# Altium PCB PCB1.PcbDoc
Units mm, origin at the board's own origin, x right, y up, seen from the top; angles counter-clockwise.
Board outline 82.6 x 21 mm, 2 copper layers (Top Layer, Bottom Layer), stack 1.571 mm thick; 58 components, 49 nets, 248 pads, 61 vias.
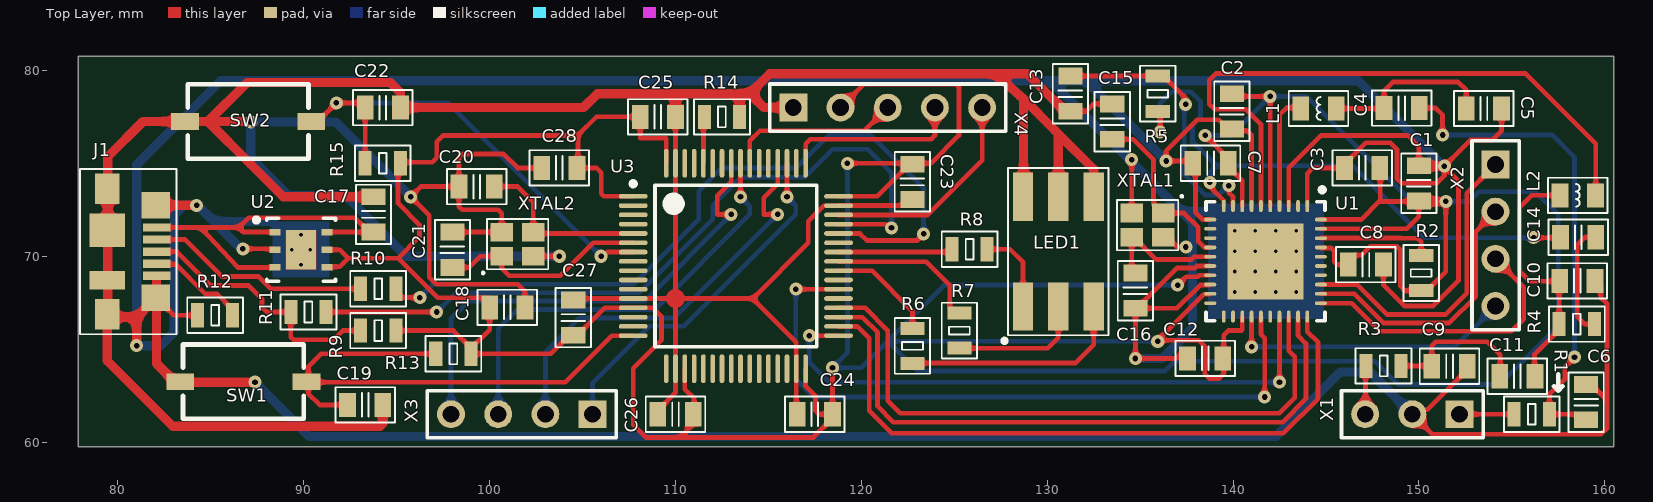
[diagram p0: Top Layer view]
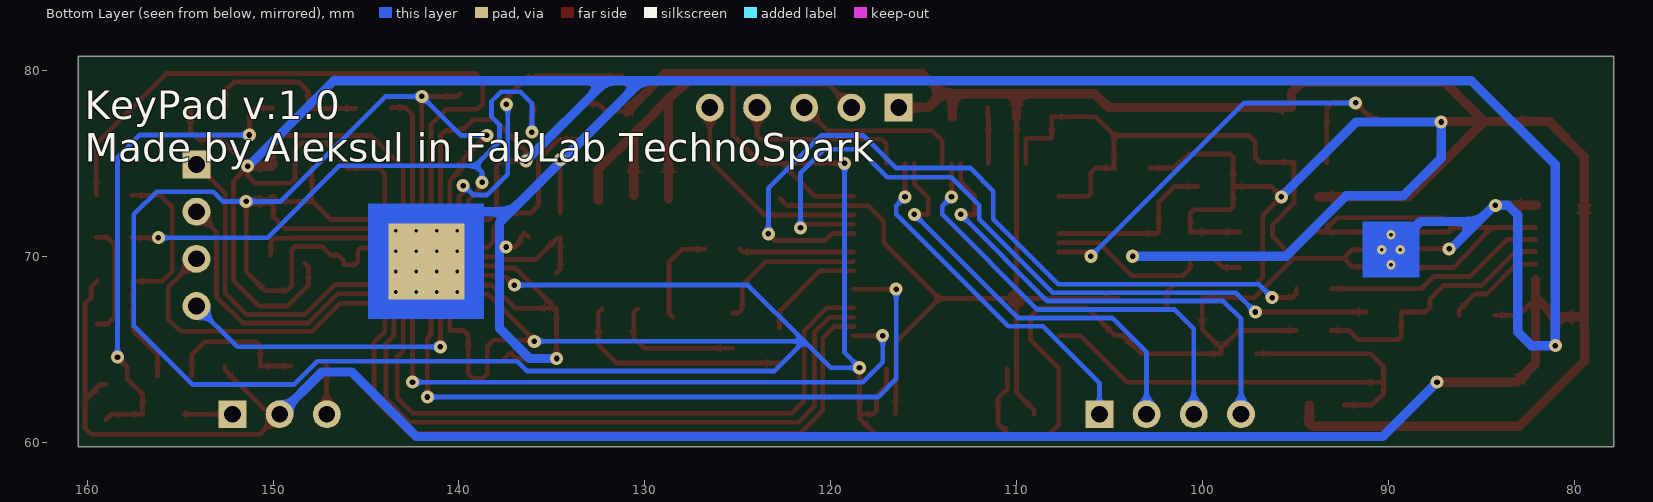
[diagram p1: Bottom Layer view, seen from below]

## Layer stack, top to bottom
Top Solder: solder mask 0.0102, Solder Resist, Dk 3.5
Top Layer: signal copper 0.0356
Dielectric 1: dielectric 1.5, FR-4, Dk 4.8
Bottom Layer: signal copper 0.0356
Bottom Solder: solder mask 0.0102, Solder Resist, Dk 3.5

## Board outline
160.475,80.75 77.875,80.75 77.875,59.75 160.475,59.75

## Design rules (kind name [scope] priority, off if disabled: settings)
Clearance [All] p1: gap=0.2 ignorepadtopadclearanceinfootprint=FALSE
PolygonConnect [All] p1: connectstyle=Relief reliefconductorwidth=0.254 reliefentries=4 polygonreliefangle="90 Angle" airgapwidth=0.254
RoutingVias [All] p1: holewidth=0.3 width=0.7 viastyle="Through Hole" minholewidth=0.3 minwidth=0.7 maxholewidth=0.711 maxwidth=1.27
SolderMaskExpansion [All] p1: expansion=0.102
Width [All] p1: maxlimit=1 minlimit=0.254 preferedwidth=0.254
30 further rules are at their usual default settings.

## Classes and differential pairs
component class pn532: C1 C2 C3 C4 C5 C6 C7 C8 C9 C10 C11 C12 C13 C14 C15 C16 L1 L2 R1 R2 R3 R4 R5 U1 X1 X2 XTAL1
component class some_mini_things: C17 C18 C19 J1 LED1 R6 R7 R8 R9 R10 R11 R12 R13 SW1 U2
component class STM32: C20 C21 C22 C23 C24 C25 C26 C27 C28 R14 R15 U3 X3 X4 XTAL2

## Components (designator, comment, footprint, x,y, rotation, side; value= is the part's Value field where it differs from the comment)
C1 "10uF 16V" C_0805 150,73.925 r270 top
C2 "100nf 16V" C_0805 139.94,77.8 r270 top
C3 "100nF 16V" C_0805 146.95,74.75 r180 top
C4 "68pF 16V" C_0805 149.075,77.975 r0 top
C5 "220pF 16V" C_0805 153.5,77.95 r180 top
C6 "100pF 16V" C_0805 159,62.15 r270 top
C7 "100nF" C_0805 138.79,75.002 r180 top
C8 "100nF" C_0805 147.15,69.55 r0 top
C9 "100pF 16V" C_0805 151.65,64.08 r0 top
C10 "220pF 16V" C_0805 158.525,68.675 r0 top
C11 "68pF 16V" C_0805 155.3,63.541 r180 top
C12 "100nF 16V" C_0805 138.5,64.5 r0 top
C13 "100nF 16V" C_0805 131.25,78.75 r90 top
C14 "1nF 16V" C_0805 158.575,71.025 r0 top
C15 "12pF 16V" C_0805 133.5,77.239 r270 top
C16 "12pF 16V" C_0805 134.75,68.15 r90 top
C17 "4.7uF 16V" C_0805 93.75,72.25 r270 top
C18 "4.7uF 16V" C_0805 100.95,67.25 r180 top
C19 "100nF 16V" C_0805 93.3,62 r0 top
C20 "10pF 16V" C_0805 99.3,73.75 r0 top
C21 "10pF 16V" C_0805 98,70.35 r270 top
C22 "100nF 16V" C_0805 94.25,78 r180 top
C23 "100nF 16V" C_0805 122.75,74 r270 top
C24 "100nF 16V" C_0805 117.5,61.5 r180 top
C25 "100nF 16V" C_0805 109.048,77.5 r0 top
C26 "100nF 16V" C_0805 110,61.5 r180 top
C27 "100nF 16V" C_0805 104.5,66.7 r90 top
C28 "100nF 16V" C_0805 103.75,74.75 r180 top
J1 "473460001" MICRO-USB 82.075,69.6 r270 top
L1 "560nH" L_0805 144.6,77.95 r180 top
L2 "560nH" L_0805 158.55,73.275 r0 top
LED1 "TO-5050BC" TO-5050BC 129.2,67.95 r270 top
R1 "1.5R" R_0805 156.075,61.5 r180 top
R2 "10k" R_0805 150.125,69.1 r90 top
R3 "1.5R" R_0805 148.1,64.1 r180 top
R4 "1.6k" R_0805 158.5,66.35 r180 top
R5 "1k" R_0805 135.95,78.75 r90 top
R6 "220R" R_0805 122.75,65.175 r270 top
R7 "220R" R_0805 125.275,66 r270 top
R8 "220R" R_0805 125.825,70.375 r0 top
R9 "1K5" R_0805 94,66 r0 top
R10 "22R" R_0805 94,68.25 r0 top
R11 "22R" R_0805 90.25,67 r0 top
R12 "100K" R_0805 85.225,66.825 r180 top
R13 "100k" R_0805 98.05,64.75 r180 top
R14 "100k" R_0805 112.5,77.5 r180 top
R15 "100k" R_0805 94.25,75.002 r180 top
SW1 "KLS7-TS3608" KLS7-TS3611 86.75,63.25 r0 top
SW2 "KLS7-TS3608" KLS7-TS3611 87,77.25 r180 top
U1 "PN532/C1" NXP-HVQFN-40_L 141.75,69.725 r270 top
U2 "LP38692-3.3V" WSON-6 89.85,70.35 r0 top
U3 "STM32F103RET6" LQFP64_L 113.25,69.475 r0 top
X1 "PLS-3" PLS-3-3D 152.19,61.5 r180 top
X2 "PLS-4" PLS-4-3D 154.125,74.94 r270 top
X3 "PLS-4" PLS-4-3D 105.54,61.5 r180 top
X4 "PLS-5" PLS-5-3D 116.34,78 r0 top
XTAL1 "27.12 MHz" NX2520SA 135.65,70.825 r180 top
XTAL2 "NX2520SA 16MHz" NX2520SA 101.25,71.5 r0 top

## Footprints (in the part's own frame and the unit in brackets; to place one, negate y for a bottom-side part, rotate by r counter-clockwise, add the part's x,y. Pads: shape width x height; smd on the part's side, far side on the other; paste and mask are expansions set on the pad)
C_0805 [mm] "Capacitor Pattern"
  rect 0.9x1.3 smd: 1(-0.95,0) 2(0.95,0)
  silkscreen extent -1.6,-0.95 1.6,0.95, body extent -1,-0.63 1,0.62, height 0.6
KLS7-TS3611 [mm]
  rect 1.5x0.9 smd mask+0: 1(-3.4,0) 2(3.4,0)
  silkscreen extent -3.25,-2 3.25,2, body extent -3.15,-1.75 3.15,1.75, height 5
L_0805 [mm] "Inductor Pattern"
  rect 0.9x1.3 smd: 1(-0.95,0) 2(0.95,0)
  silkscreen extent -1.6,-0.95 1.6,0.95, body extent -1,-0.6 1,0.6, height 0.96
LQFP64_L [mm] "Thin QFP, 64-Leads, Body 10x10mm, Pitch 0.5mm, IPC High Density"
  oval 1.55x0.25 smd: 1(-5.525,3.75) 2(-5.525,3.25) 3(-5.525,2.75) 4(-5.525,2.25) 5(-5.525,1.75) 6(-5.525,1.25) 7(-5.525,0.75) 8(-5.525,0.25) 9(-5.525,-0.25) 10(-5.525,-0.75) 11(-5.525,-1.25) 12(-5.525,-1.75) 13(-5.525,-2.25) 14(-5.525,-2.75) 15(-5.525,-3.25) 16(-5.525,-3.75) 33(5.525,-3.75) 34(5.525,-3.25) 35(5.525,-2.75) 36(5.525,-2.25) 37(5.525,-1.75) 38(5.525,-1.25) 39(5.525,-0.75) 40(5.525,-0.25) 41(5.525,0.25) 42(5.525,0.75) 43(5.525,1.25) 44(5.525,1.75) 45(5.525,2.25) 46(5.525,2.75) 47(5.525,3.25) 48(5.525,3.75)
  oval 0.25x1.55 smd: 17(-3.75,-5.525) 18(-3.25,-5.525) 19(-2.75,-5.525) 20(-2.25,-5.525) 21(-1.75,-5.525) 22(-1.25,-5.525) 23(-0.75,-5.525) 24(-0.25,-5.525) 25(0.25,-5.525) 26(0.75,-5.525) 27(1.25,-5.525) 28(1.75,-5.525) 29(2.25,-5.525) 30(2.75,-5.525) 31(3.25,-5.525) 32(3.75,-5.525) 49(3.75,5.525) 50(3.25,5.525) 51(2.75,5.525) 52(2.25,5.525) 53(1.75,5.525) 54(1.25,5.525) 55(0.75,5.525) 56(0.25,5.525) 57(-0.25,5.525) 58(-0.75,5.525) 59(-1.25,5.525) 60(-1.75,5.525) 61(-2.25,5.525) 62(-2.75,5.525) 63(-3.25,5.525) 64(-3.75,5.525)
  silkscreen extent -5.65,-4.35 4.35,4.55, body extent -4.35,-4.35 4.35,4.35, height 1.6
MICRO-USB [mm] "molex 473460001"
  rect 0.45x1.48 smd mask+0.1: 1(-1.95,0) 2(-1.3,0) 3(-0.65,0) 4(0,0)
  rect 0.45x1.48 smd paste+0 mask+0.1: 5(0.65,0)
  rect 1.65x1.3 smd mask+0.1: 6(-4.025,-2.65) 6(2.725,-2.65)
  rect 1.425x1.55 smd mask+0.1: 6(-3.14,-0.04) 6(1.84,-0.04)
  rect 1.8x1.9 smd mask+0.1: 6(-1.8,-2.65)
  rect 1x1.9 smd mask+0.1: 6(0.9,-2.65)
  silkscreen extent -5.1,-4.13 3.8,1.07, body extent -4.64,-4.45 3.34,0.98, height 2.63
NX2520SA [mm] "quartz resonator"
  rect 1.2x1 smd: 1(-0.6,-1.5) 2(1.1,-1.5) 3(1.1,-0.2) 4(-0.6,-0.2)
  silkscreen extent -1.65,-2.45 1.9,0.5, body extent -1.4,-2.2 1.9,0.5, height 0.5
NXP-HVQFN-40_L [mm] "QFN, 40-Leads, Body 6.1x6.1mm, Pitch 0.5mm, Thermal Pad 4.1x4.1mm, IPC High Density"
  oval 0.65x0.2 smd: 1(-2.975,2.25) 2(-2.975,1.75) 3(-2.975,1.25) 4(-2.975,0.75) 5(-2.975,0.25) 6(-2.975,-0.25) 7(-2.975,-0.75) 8(-2.975,-1.25) 9(-2.975,-1.75) 10(-2.975,-2.25) 21(2.975,-2.25) 22(2.975,-1.75) 23(2.975,-1.25) 24(2.975,-0.75) 25(2.975,-0.25) 26(2.975,0.25) 27(2.975,0.75) 28(2.975,1.25) 29(2.975,1.75) 30(2.975,2.25)
  oval 0.2x0.65 smd: 11(-2.25,-2.975) 12(-1.75,-2.975) 13(-1.25,-2.975) 14(-0.75,-2.975) 15(-0.25,-2.975) 16(0.25,-2.975) 17(0.75,-2.975) 18(1.25,-2.975) 19(1.75,-2.975) 20(2.25,-2.975) 31(2.25,2.975) 32(1.75,2.975) 33(1.25,2.975) 34(0.75,2.975) 35(0.25,2.975) 36(-0.25,2.975) 37(-0.75,2.975) 38(-1.25,2.975) 39(-1.75,2.975) 40(-2.25,2.975)
  rect 4.1x4.1 smd: 41(0,0)
  rect 4.1x4.1 smd far side: 41(0,0)
  silkscreen extent -3.97,-3.2 3.2,3.2, body extent -3.05,-3.05 3.05,3.05, height 1
PLS-3-3D [mm] "Connector; Header; 3 Position"
  rect 1.5x1.5 hole 0.9: 1(0,0)
  round 1.5 hole 0.9: 2(2.54,0) 3(5.08,0)
  silkscreen extent -1.27,-1.27 6.35,1.27, body extent -1.27,-1.27 6.35,1.27, height 8.44
PLS-4-3D [mm] "Connector; Header; 4 Position"
  rect 1.5x1.5 hole 0.9: 1(0,0)
  round 1.5 hole 0.9: 2(2.54,0) 3(5.08,0) 4(7.62,0)
  silkscreen extent -1.27,-1.27 8.89,1.27, body extent -1.27,-1.27 8.89,1.27, height 8.44
PLS-5-3D [mm] "Connector; Header; 5 Position"
  rect 1.5x1.5 hole 0.9: 1(0,0)
  round 1.5 hole 0.9: 2(2.54,0) 3(5.08,0) 4(7.62,0) 5(10.16,0)
  silkscreen extent -1.27,-1.27 11.43,1.27, body extent -1.27,-1.27 11.43,1.27, height 8.44
R_0805 [mm] "Resistor Pattern"
  rect 0.7x1.3 smd: 1(-0.95,0) 2(0.95,0)
  silkscreen extent -1.5,-0.95 1.5,0.95, body extent -1,-0.6 1,0.6, height 0.5
TO-5050BC [mm] "RGB led"
  rect 2.6x1.1 smd: 1(-5.25,-0.5) 2(-5.25,1.4) 3(-5.25,3.3) 4(0.65,3.3) 5(0.65,1.4) 6(0.65,-0.5)
  silkscreen extent -6.8,-1.6 2.6,4.1, body extent -6.8,-1.3 2.2,4.1, height 1.9
WSON-6 [mm] "TI wson"
  rect 0.6x0.35 smd paste-0.175 mask+0.051: 1(-1.4,0.95) 2(-1.4,0) 3(-1.4,-0.95) 4(1.4,-0.95) 5(1.4,0) 6(1.4,0.95)
  rect 1.6x2.1 smd paste-0.8 mask+0.051: 7(0,0)
  silkscreen extent -2.52,-1.7 1.85,1.72, body extent -1.51,-1.49 1.51,1.51, height 0.75

## Part data
C1 C2 C3 C4 C5 C6 C7 C8 C9 C10 C11 C12 C13 C14 C15 C16 C17 C18 C19 C20 C21 C22 C23 C24 C25 C26 C27 C28: library part C0805, "Capacitor"
J1: library part MICRO-USB, "molex 473460001"
L1 L2: library part L0805, "MLF2012DR56K"
LED1: "RGB led"
R1 R2 R3 R4 R5 R6 R7 R8 R9 R10 R11 R12 R13 R14 R15: library part R0805, "Resistor"
SW1 SW2: library part button
U2: library part LP38692, "LP38690, LP38692 1-A LDO CMOS Linear Regulators  Stable with Ceramic Output Capacitors"
U3: "STM32 ARM-based 32-bit MCU Performance Line with 512 kB Flash, 64 kB Internal RAM, -40 to +85°C Temperature, 64-Pin LQFP, Tray", ComponentLink1Description="Manufacturer URL", ComponentLink1URL=http://www.st.com/, ComponentLink2Description="STM32F103 Datasheet", ComponentLink2URL=http://www.st.com/internet/com/TECHNICAL_RESOURCES/TECHNICAL_LITERATURE/DATASHEET/CD00191185.pdf, ComponentLink3Description="STM32 Family Web Page", ComponentLink3URL=www.st.com/stm32, DatasheetVersion="rev8.0, Apr-2011", PackageDescription="64-Pin Low-Profile Quad Flat Pack, 10 x 10 mm Body, 0.5 mm Pitch (LQFP64)", PackageReference=LQFP64, PackageVersion="rev13, Apr-2011"
X1: "Header, 3-Pin", LatestRevisionDate=17-Jul-2002, LatestRevisionNote="Re-released for DXP Platform.", Publisher="Altium Limited"
X2 X3: "Header, 4-Pin", LatestRevisionDate=17-Jul-2002, LatestRevisionNote="Re-released for DXP Platform.", Publisher="Altium Limited"
X4: "Header, 5-Pin", LatestRevisionDate=17-Jul-2002, LatestRevisionNote="Re-released for DXP Platform.", Publisher="Altium Limited"
XTAL1 XTAL2: library part NX2520SA, "Quartz"

## Via types
v1: diameter 0.7, hole 0.3, Top Layer to Bottom Layer, tented both sides, 41 vias
v2: diameter 0.5, hole 0.2, Top Layer to Bottom Layer, 20 vias

## Nets (pads, with @x,y where several pads share a name; then routed paths per layer and width w, separated by ;. In a path a pad name is that pad's centre, name@x,y a point inside that pad or via, vN(x,y) a via of type N, cw(c..) or ccw(c..) an arc to the next point about the centre after c; other vN are vias at no path point)
+3.3: C1.2 C2.1 C3.1 C7.1 C8.1 C12.2 C18.2 C23.1 C24.1 C25.1 C26.1 C27.1 C28.1 R2.1 R9.2 R13.1 R15.1 U1.5 U1.8 U1.17 U1.19 U1.23 U1.37 U1.39 U1.40 U2.4 U2.5 U3.1 U3.13 U3.19 U3.32 U3.48 U3.64 X4.2 | length 281.9
  Top Layer w0.254: U2.4 91.281,69.431 91.931,69.431 92.388,69.888 ; U2.5 91.256,70.344 91.931,70.344 92.388,69.888 ; R9.2 98.05,66 R13.1@99,65.05 ; R15.1@95.073,75.062 95.202,75.058 96.907,75.058 97.149,75.3 97.149,76.149 97.5,76.5 104.75,76.5 ; 95.084,69.899 97.209,67.773 100,67.773 C18.2 100,66.05 R13.1@99,65.05 ; R15.1 95.073,74.875 95.073,72.852 96.225,71.7 96.225,71.051 95.073,69.899 92.399,69.899 92.388,69.888 ; U3.1 106.149,73.225 106,73.374 106,74.5 105.75,74.75 C28.1 104.75,74.8 104.75,76.5 ; U3.64 109.5,76.351 108.1,76.351 108.1,77.5 C25.1 105.75,77.5 104.75,76.5 ; U3.19 110.5,62.851 111,62.351 111,61 110.25,60.25 ; U3.32 117,63 117.535,62.465 117.535,61.679 117.714,61.5 C24.1 ; v1(118.45,64) C24.1 ; U3.48 120.85,73.225 122.625,75 v1(119.25,75) ; X4.2 120.13,79.25 125.101,79.25 125.25,79.101 125.25,76.5 123.752,75.002 C23.1@122.725,75.002 ; v1(137.025,68.45) 137.477,68.902 138.111,68.902 138.184,68.975 U1.17 ; v1(138.5,76.5) 139.74,75.26 C7.1 139.74,74.836 140.5,74.075 U1.8 ; U1.19@138.748,67.948 138.419,67.948 135.95,65.479 v1(135.95,65.425) 136.002,65.477 138.148,65.477 138.475,65.15 138.475,63.673 138.723,63.425 139.25,63.425 139.5,63.675 139.5,65.75 139.75,66 140.456,66 140.5,66.044 U1.23 ; C2.1 140.09,78.6 v1(142,78.6) U1.5 ; C7.1@139.994,74.788 C7.1@139.994,74.994 ; U1.37@144.725,70.448 145.277,70.448 145.45,70.275 145.45,69.7 145.6,69.55 146.096,69.55 C8.1@146.2,69.654 ; U1.39 149.36,71.475 150,72.115 C1.2@150,73.05 ; U1.40 146.9,71.975 147.875,72.95 149.85,72.95 C1.2@150,73.1 ; C8.1 C8.1@146.2,69.654 ; 147.925,72.95 C3.1@147.925,74.75 ; v1(151.45,72.95) 151.45,69.175 150.425,68.15 R2.1 149.25,68.15 149,68.4 149,70.35 148.823,70.527 147.387,70.527 146.933,70.073 146.523,70.073 146.2,69.75 C8.1@146.2,69.654 ; R13.1@99,65.05 R13.1 103.3,64.75 104.3,65.75 C27.1 104.725,65.75 106.2,67.225 U3.13 108.775,67.225 109.25,66.75 109.25,65.5 107.725,63.975 107.725,60.925 108.4,60.25 110.25,60.25 ; 110.25,60.25 117.425,60.25 118.45,61.275 C24.1
  Top Layer w0.5: C1.2@150,73.1 150.05,73.1 150.2,72.95 v1(151.45,72.95)
  Bottom Layer w0.254: v1(119.25,75) 119.25,64.8 v1(118.45,64) 120,64 121.425,65.425 ; v1(135.95,65.425) 121.425,65.425 ; v1(137.025,68.45) 124.45,68.45 121.425,65.425 ; v1(138.5,76.5) 139.9,76.5 v1(142,78.6) 143.95,78.6 149.6,72.95 v1(151.45,72.95) 152.707,72.95 153.234,73.477 156.273,73.477 157.5,72.25 157.5,66.25 154.35,63.1 148.866,63.1 147.614,64.352 136.868,64.352 136.339,63.823 123.027,63.823 121.425,65.425
+5: C17.2 J1.1 U2.1 U2.3 U2.6 | length 21.7
  Top Layer w0.254: J1.1 84.425,71.55 ; 86.35,71.55 86.5,71.55 ; U2.3@88.438,69.388 U2.3 86.45,69.4 84.425,71.55 ; U2.1 86.75,71.3 86.5,71.55 ; U2.6 C17.2@93.525,71.3 ; C17.2 C17.2@93.525,71.3 ; 84.425,71.55 86.5,71.55 ; 86.5,71.55 87.025,72.075 92.75,72.075 C17.2@93.525,71.3
GND: C1.1 C2.2 C3.2 C5.1 C6.1 C7.2 C8.2 C9.2 C10.2 C12.1 C13.1 C15.1 C16.1 C17.1 C18.1 C19.2 C20.1 C21.1 C22.1 C23.2 C24.2 C25.2 C26.2 C27.2 C28.2 J1.5 J1.6 LED1.1 LED1.2 LED1.3 R12.2 R14.1 SW1.1 SW2.2 U1.1 U1.3 U1.7 U1.11 U1.16 U1.18 U1.41 U2.2 U2.7 U3.12 U3.18 U3.31 U3.47 U3.63 X1.2 X4.1 XTAL1.2 XTAL1.4 XTAL2.2 XTAL2.4 | length 553.3
  Top Layer w0.254: J1.6@82.075,67.1 82.4,67.425 83,66.825 R12.2 ; v1(86.725,70.4) 88.4,70.4 U2.2 ; v2(89.35,70.35) U2.7 ; C21.1 XTAL2.4 100.65,72.31 100.46,72.5 98.525,72.5 98.35,72.675 C20.1 ; C18.1 101.9,68.125 101.525,68.5 97.124,68.5 96.75,68.874 96.75,72.2 v1(95.75,73.2) 96.3,73.75 C20.1 ; XTAL2.2 v1(103.75,70) ; C28.2 101.5,74.75 100.75,75.5 98.499,75.5 98.35,75.351 C20.1 ; C27.2@104.5,67.725 U3.12 109.75,67.725 110,67.725 ; C26.2 109.05,61.7 110,62.65 U3.18 110,65.5 110,67.475 110,67.725 ; C25.2@110,77.5 U3.63 110,67.975 110,67.725 ; C24.2 116.5,61.55 U3.31 116.498,63.952 116.498,65.377 114.15,67.725 ; C23.2@122.725,73.102 122.35,72.727 118.777,72.727 U3.47 118.773,72.723 117.984,72.723 117.15,71.889 117.15,70.725 114.15,67.725 ; C13.1 132.1,77.8 132.5,78.2 C15.1@133.5,78.2 ; XTAL1.2 v1(134.55,75.2) ; C16.1 C16.1@134.95,67.2 ; XTAL1.4 136.475,71.25 136.663,71.062 136.663,70.835 137,70.498 v1(137.466,70.498) ; C12.1 137.25,64.8 136.95,64.5 v1(134.75,64.5) 134.75,67 C16.1@134.95,67.2 ; U1.18@138.748,68.448 138.23,68.448 136.982,67.2 C16.1@134.95,67.2 ; U1.16 138.042,69.475 137.934,69.367 136.985,69.367 134.95,67.332 C16.1@134.95,67.2 ; U1.11 138.374,71.975 137.977,72.372 137.977,74.864 C7.2 137.717,75.125 v1(136.4,75.125) 136.4,75.675 138.077,77.352 139.238,77.352 139.74,76.85 C2.2 140.04,76.75 140.75,76.75 141,76.5 U1.7 ; U1.41@139.827,69.718 U1.41@139.834,69.725 ; U1.41@141.466,69.725 U1.41@141.608,69.583 ; U1.3 143,74.75 144.75,76.5 149.4,76.5 150,75.9 C1.1@150,74.95 ; U1.1 144,74.45 144.3,74.75 C3.2 146,74.95 147.15,76.1 148.473,76.1 148.823,75.75 148.823,74.177 149.075,73.925 150.975,73.925 151.375,74.325 v1@151.375,74.82 ; C8.2@148.325,69.65 148.096,69.421 148.096,68.454 149.23,67.32 150.757,67.32 152.127,68.69 152.127,74.068 v1@151.375,74.82 ; C9.2 152.6,63.88 150.458,61.738 149.888,61.738 X1.2 150.727,60.423 159.799,60.423 160.127,60.751 160.127,62.25 ; C5.1 154.45,76.75 153.95,76.25 152.775,76.25 v1(151.375,74.85) v1@151.375,74.82 ; C6.1 159.277,63.1 160.127,62.25 ; C10.2 159.798,68.352 159.798,67.767 160.127,67.438 160.127,62.25 ; 110,67.725 110.25,67.725 114.15,67.725
  Top Layer w0.5: 79.425,66 79.425,64.375 82.95,60.85 94.101,60.85 94.25,60.999 C19.2 ; J1.6@79.45,66.2 79.45,66.735 81.01,66.735 ; J1.6@79.45,66.975 79.45,68.7 79.45,71.4 79.45,73.625 79.45,75.35 81.35,77.25 SW2.2 84.85,77.25 ; v1(81.01,65.19) 81.01,66.735 ; J1.6@82.035,67.76 81.01,66.735 ; J1.6@82.035,72.74 v1(84.235,72.74) ; J1.5@82.075,68.75 82.075,67.76 82.075,67.1 82.075,64.225 83.05,63.25 SW1.1 ; SW1.1@83.35,63.225 v1(87.375,63.225) ; v1(87.15,77.225) 87.125,77.25 84.85,77.25 ; C17.1 88.9,73.2 ; C25.2@110,77.5 110,78.75 ; R14.1 113.45,78.75 ; X4.1 114.75,78 114,78.75 ; LED1.1@128.725,73.075 128.725,78.475 ; LED1.2@130.6,73.275 130.6,75.925 130.6,76.575 ; C13.1@130.975,77.775 128.923,79.827 127.173,79.827 ; LED1.3@132.5,73 132.5,74.675 130.6,76.575 130.401,76.776 128.725,78.475 ; C1.1@150,74.95 150.1,74.85 v1(151.375,74.85) ; 84.85,77.25 87.15,74.95 ; 84.85,77.25 86.951,79.351 94.649,79.351 95.2,78.8 C22.1 105.05,78 105.8,78.75 110,78.75 ; 87.15,74.95 88.9,73.2 ; 87.15,74.95 88.9,73.2 ; 110,78.75 113.45,78.75 ; 113.45,78.75 114,78.75 ; 114,78.75 115.077,79.827 127.173,79.827 ; 127.173,79.827 128.531,78.644 128.725,78.475 ; 109.75,67.725 cw(c110,67.725) 110,67.975 cw(c110,67.725) 110.25,67.725 cw(c110,67.725) 110,67.475 cw(c110,67.725) 109.75,67.725
  Bottom Layer w0.5: v1(86.725,70.4) 86.625,70.4 85.16,71.865 ; v1(87.375,63.225) 90.3,60.3 142.25,60.3 ; 88.75,71.375 88.26,71.865 85.16,71.865 ; v1(95.75,73.2) 91.725,77.225 v1(87.15,77.225) 87.15,75.288 89.188,73.25 92.25,73.25 95.5,70 v1(103.75,70) ; v1(134.75,64.5) 136.2,64.5 137.825,66.125 137.825,71.8 137.225,72.4 ; v1(136.4,75.125) 132.075,79.45 ; 141.75,71.815 141.165,72.4 137.225,72.4 ; 142.3,60.3 145.775,63.775 147.375,63.775 X1.2 ; v1(151.375,74.85) 151.345,74.85 146.745,79.45 132.075,79.45 ; 85.16,71.865 84.285,72.74 v1(84.235,72.74) 83.565,72.74 83.025,72.2 83.025,65.925 82.29,65.19 v1(81.01,65.19) 81.01,74.935 85.525,79.45 130.175,79.45 ; 130.175,79.45 137.225,72.4 ; 130.175,79.45 132.075,79.45
  other v2: 140.1,68.075 141.2,68.075 142.3,68.075 143.4,68.075 140.1,69.175 141.2,69.175 142.3,69.175 143.4,69.175 89.85,69.55 140.1,70.275 141.2,70.275 142.3,70.275 143.4,70.275 90.35,70.35 89.85,71.15 140.1,71.375 141.2,71.375 142.3,71.375 143.4,71.375
INT0_PN532: U3.57 X3.4 | length 26.3
  Top Layer w0.254: v1(113,72.25) 112.25,72.25 112.25,73.25 112.998,73.998 112.998,74.998 U3.57
  Bottom Layer w0.254: X3.4 97.92,66.629 98.879,67.588 108.338,67.588 v1(113,72.25)
INT1_PN532: U3.56 X3.3 | length 23.7
  Top Layer w0.254: v1(113.5,73.2) U3.56
  Bottom Layer w0.254: X3.3 100.46,66.11 101.484,67.134 108.884,67.134 114,72.25 114,72.7 v1(113.5,73.2)
NetC4_1: C4.1 C5.2 L1.1 | length 9.3
  Top Layer w0.254: L1.1 148.1,77.95 C4.1 148.125,78.901 148.599,79.375 152.125,79.375 152.55,78.95 C5.2
NetC4_2: C4.2 C6.2 R1.1 | length 26.6
  Top Layer w0.254: C4.2 150.9,77.975 151.275,77.6 v1(151.275,76.525) ; v1(158.375,64.575) 158.375,64.55 157.85,64.025 157.85,63.393 157.025,62.568 R1.1 158.7,61.5 C6.2
  Bottom Layer w0.254: v1(151.275,76.525) 157.175,76.525 158.375,75.325 v1(158.375,64.575)
NetC9_1: C9.1 C11.2 R3.1 | length 8
  Top Layer w0.254: R3.1 150.68,64.1 C9.1 150.7,65.19 150.91,65.4 153.675,65.4 154.375,64.7 C11.2@154.375,63.55
NetC10_1: C10.1 C11.1 L2.1 R4.2 | length 13.9
  Top Layer w0.254: C11.1@156.225,63.55 156.225,64.725 157.55,66.05 R4.2 157.55,68.65 155.972,68.65 155.425,69.197 155.425,72.625 156.075,73.275 L2.1
NetC13_2: C13.2 R5.2 U1.9 | length 14.8
  Top Layer w0.254: C13.2 R5.2 ; R5.2@136.25,79.7 137.45,78.5 v1(137.45,78.175) ; v1(139.775,73.8) 139.775,73.415 140,73.19 U1.9
  Bottom Layer w0.254: v1(137.45,78.175) 137.369,78.094 137.369,74.409 138.477,73.302 139.24,73.302 139.738,73.8 v1(139.775,73.8)
NetC14_1: C14.1 R5.1 U1.10 | length 32.5
  Top Layer w0.254: R5.1@135.95,78 R5.1 135.95,77.777 136.075,77.652 v1(136.075,76.675) ; v1(138.757,73.979) 138.757,73.757 138.75,73.75 139.5,73 U1.10 ; v1(156.175,71) 157.6,71 C14.1
  Bottom Layer w0.254: v1(136.075,76.675) 136.075,78.225 136.702,78.852 137.73,78.852 138.25,78.332 138.25,77.5 137.823,77.073 137.823,76.152 139.113,74.862 ; v1(138.757,73.979) 138.757,74.507 139.113,74.862 ; v1(156.175,71) 150.3,71 146.438,74.862 139.113,74.862
NetC14_2: C14.2 R4.1 | length 6.1
  Top Layer w0.254: R4.1 158.925,66.35 158.525,66.75 158.525,70.625 158.925,71.025 C14.2
NetC15_2: C15.2 U1.14 XTAL1.1 | length 9.6
  Top Layer w0.254: C15.2 134.634,76.289 135.723,75.2 135.723,72.752 136.15,72.325 XTAL1.1 137.358,72.325 138.123,71.56 138.123,70.798 138.446,70.475 U1.14
NetC16_2: C16.2 U1.15 XTAL1.3 | length 6.6
  Top Layer w0.254: XTAL1.3 134.55,69.3 C16.2 ; XTAL1.3@134.723,70.975 135.877,69.821 137.746,69.821 137.9,69.975 U1.15
NetC19_1: C19.1 R13.2 SW1.2 U3.16 | length 29.5
  Top Layer w0.254: C19.1 90.851,62 90.25,62.601 SW1.2@90.25,63.225 ; R13.2 90.935,64.75 90.25,64.065 SW1.2@90.25,63.225 ; U3.16 106.569,65.725 104.069,63.225 SW1.2@90.25,63.225
NetC20_2: C20.2 U3.5 XTAL2.3 | length 9.5
  Top Layer w0.254: C20.2 101.5,73.75 102.35,72.9 XTAL2.3 102.425,71.225 U3.5
NetC21_2: C21.2 U3.6 XTAL2.1 | length 11.5
  Top Layer w0.254: C21.2 98.9,69.4 99.5,70 XTAL2.1 100.65,69.35 101.046,68.954 103.805,68.954 105.576,70.725 U3.6
NetC22_2: C22.2 R15.2 SW2.1 U3.7 | length 25.9
  Top Layer w0.254: SW2.1 90.608,77.458 90.958,77.458 v1(91.75,78.25) 93,78.25 93.275,77.975 C22.2 R15.2 ; v1(106,70) 106.121,70 106.346,70.225 U3.7
  Bottom Layer w0.254: v1(91.75,78.25) 97.75,78.25 v1(106,70)
NetJ1_2: J1.2 R10.1 | length 12.1
  Top Layer w0.254: J1.2 83.625,70.9 85.619,68.906 87.567,68.906 88.223,68.25 R10.1
NetJ1_3: J1.3 R9.1 R11.1 | length 14.2
  Top Layer w0.254: J1.3 83.173,70.25 85,68.423 87.035,68.423 87.75,67.708 87.75,67.25 88,67 R11.1 89.3,65.649 89.449,65.5 91.601,65.5 92.101,66 R9.1
NetJ1_4: J1.4 R12.1 | length 5.4
  Top Layer w0.254: J1.4 82.1,69.575 83.1,69.575 84.706,67.969 85.331,67.969 86.175,67.125 R12.1
NetL1_2: L1.2 U1.4 | length 6.2
  Top Layer w0.254: U1.4 142.5,77.6 142.9,78 143.6,78 L1.2
NetL2_2: L2.2 U1.6 | length 34.2
  Top Layer w0.254: U1.6 141.5,77.1 140.698,77.902 139.01,77.902 138.723,78.189 138.723,79.473 139.079,79.829 155.746,79.829 159.525,76.05 159.525,73.3 L2.2
NetLED1_4: LED1.4 R6.2 | length 12.2
  Top Layer w0.254: R6.2@122.75,64.25 131.5,64.25 132.5,65.25 132.5,66.975 LED1.4@132.3,67.175
NetLED1_5: LED1.5 R7.2 | length 7.2
  Top Layer w0.254: R7.2 130.025,65.05 130.6,65.625 130.6,66.975 LED1.5@130.4,67.175
NetLED1_6: LED1.6 R8.2 | length 5.1
  Top Layer w0.254: R8.2 128,70.375 128.7,69.675 LED1.6 ; LED1.6@128.5,66.725 128.7,66.925 LED1.6@128.7,67.175
NetR1_2: R1.2 X1.1 | length 2.6
  Top Layer w0.254: X1.1 R1.2@154.8,61.5
NetR2_2: R2.2 U1.38 | length 6.2
  Top Layer w0.254: U1.38 144.731,70.981 149.011,70.981 149.017,70.975 149.925,70.975 150.125,70.775 R2.2
NetR3_2: R3.2 X1.3 | length 2.6
  Top Layer w0.254: X1.3 147.13,61.52 147.13,64.08 R3.2
NetR6_1: R6.1 U3.40 | length 5.8
  Top Layer w0.254: U3.40 118.777,69.223 120.577,69.223 122.75,67.05 R6.1
NetR7_1: R7.1 U3.41 | length 8.4
  Top Layer w0.254: U3.41 118.803,69.697 123.499,69.697 124.752,68.445 124.752,67.173 124.975,66.95 R7.1
NetR8_1: R8.1 U3.42 | length 6.2
  Top Layer w0.254: U3.42 124.725,70.225 R8.1
NetR10_2: R10.2 U3.44 | length 41.7
  Top Layer w0.254: R10.2 94.95,67.998 95.173,67.775 v1(96.25,67.775) ; U3.44 118.777,71.223 119.927,71.223 120.302,70.848 122.998,70.848 v1(123.35,71.2)
  Bottom Layer w0.254: v1(96.25,67.775) 96.971,68.496 107.746,68.496 111.25,72 111.25,73.5 112.5,74.75 116.5,74.75 118.25,76.5 120.5,76.5 123.35,73.65 v1(123.35,71.2)
NetR11_2: R11.2 U3.45 | length 40.9
  Top Layer w0.254: R11.2 v1(97.149,67) ; U3.45 121.304,71.725 121.504,71.525 v1(121.625,71.525)
  Bottom Layer w0.254: v1(97.149,67) 98.191,68.042 108.042,68.042 112,72 112,72.75 113.5,74.25 116.95,74.25 118.45,75.75 120.351,75.75 121.625,74.476 v1(121.625,71.525)
NetR14_2: R14.2 U3.60 | length 3
  Top Layer w0.254: U3.60 U3.60 111.502,77.452 R14.2 R14.2@111.55,78
NetU1_24: U1.24 X2.4 | length 15.7
  Top Layer w0.254: v1(141,65.125) U1.24
  Bottom Layer w0.254: v1(141,65.125) 151.93,65.125 X2.4
NetU1_25: U1.25 U3.38 | length 37.2
  Top Layer w0.254: v1(116.475,68.225) U3.38 ; U1.25 141.5,65.8 141.7,65.6 v1(141.7,62.425)
  Bottom Layer w0.254: v1(116.475,68.225) 116.475,63.4 117.45,62.425 v1(141.7,62.425)
NetU1_27: U1.27 U3.33 | length 32.3
  Top Layer w0.254: v1(117.2,65.725) U3.33 ; v1(142.5,63.225) U1.27
  Bottom Layer w0.254: v1(117.2,65.725) 117.2,64.293 118.268,63.225 v1(142.5,63.225)
NetU1_28: U1.28 U3.36 | length 34
  Top Layer w0.254: U3.36 120.2,67.225 121.425,66 121.425,62.225 122.1,61.55 142.5,61.55 143.325,62.375 143.325,64.6 143,64.925 U1.28
NetU1_29: U1.29 U3.35 | length 34.9
  Top Layer w0.254: U3.35 120.05,66.725 120.875,65.9 120.875,61.925 121.725,61.075 142.667,61.075 143.925,62.333 143.925,65.3 143.5,65.725 U1.29
NetU1_30: U1.30 U3.34 | length 35.9
  Top Layer w0.254: U3.34 118.777,66.223 119.773,66.223 120.421,65.575 120.421,61.679 121.625,60.475 142.709,60.475 144.575,62.341 144.575,65.375 144,65.95 U1.30
NetU1_31: U1.31 X2.3 | length 15.8
  Top Layer w0.254: U1.31 146.391,67.475 147.908,65.958 154.979,65.958 155.641,66.62 155.641,68.339 154.234,69.746 X2.3@154.011,69.746
NetU1_32: U1.32 X2.2 | length 14.6
  Top Layer w0.254: U1.32 146.533,67.975 148.096,66.412 151.629,66.412 153.048,67.831 153.048,71.323 X2.2
NetU1_33: U1.33 X2.1 | length 16.6
  Top Layer w0.254: U1.33 146.675,68.475 148.284,66.866 151.441,66.866 152.581,68.006 152.581,73.396 X2.1
SYS_JTCK-SWCLK: U3.49 X4.4 | length 9.7
  Top Layer w0.254: U3.49 117.002,75.002 117.002,76.048 117.25,76.296 123.756,76.296 123.96,76.5 X4.4
SYS_JTDO-TRACESWO: U3.55 X4.3 | length 9.4
  Top Layer w0.254: U3.55 114,76.202 114.548,76.75 120.17,76.75 X4.3
SYS_JTMS-SWDIO: U3.46 X4.5 | length 11.8
  Top Layer w0.254: U3.46 123.568,72.225 126.5,75.157 X4.5
UART_RX_PN532_DEBUG: U3.52 X3.2 | length 22.7
  Top Layer w0.254: v1(115.5,72.25) 114.75,72.25 114.75,73.149 115.498,73.897 115.498,74.998 U3.52
  Bottom Layer w0.254: X3.2 103,64.825 104.855,66.68 109.93,66.68 v1(115.5,72.25)
UART_TX_PN532_DEBUG: U3.51 X3.1 | length 19.3
  Top Layer w0.254: v1(116,73.2) U3.51
  Bottom Layer w0.254: X3.1 105.54,63.19 108.576,66.226 110.433,66.226 116.475,72.268 116.475,72.725 v1(116,73.2)
pads on no net: U1.2 U1.12 U1.13 U1.20 U1.21 U1.22 U1.26 U1.34 U1.35 U1.36 U3.2 U3.3 U3.4 U3.8 U3.9 U3.10 U3.11 U3.14 U3.15 U3.17 U3.20 U3.21 U3.22 U3.23 U3.24 U3.25 U3.26 U3.27 U3.28 U3.29 U3.30 U3.37 U3.39 U3.43 U3.50 U3.53 U3.54 U3.58 U3.59 U3.61 U3.62

## Polygon pours and split planes (outlines as drawn)
no net on Top Layer "Top Layer-No Net 1" (solid, pour order 0): 89.05,71.4 90.65,71.4 90.65,69.3 89.05,69.3
no net on Top Layer "Top Layer-No Net" (solid, pour order 2): 89.35,70.875

## Other copper
Top Layer:
  region: 139.75,71.75
Bottom Layer:
  rectangle net GND: 88.325,68.85 91.375,71.865
  region net GND: 138.663,72.837 144.875,72.837 144.875,66.625 138.663,66.625

## Silkscreen, mask and mechanical layers (free items; w line width, h text height)
Top Overlay:
  lines w0.254: 157.275,63 157.5,62.775 ; 157.5,63.65 157.5,62.775 ; 157.725,63 157.5,62.775
Bottom Overlay:
  text "KeyPad v.1.0 / Made by Aleksul in FabLab TechnoSpark" at 160.15,75.075 h1.52
Board:
  region: 77.65,83.1
  lines w0.2: 77.875,59.75 160.475,59.75 160.475,80.75 77.875,80.75 77.875,59.75